# Altium PCB CL-HC-SubV2.0(change).PcbDoc (part 1 of 2)
Units mm, origin at the board's own origin, x right, y up, seen from the top; angles counter-clockwise.
Board outline 326.29 x 232.51 mm, 2 copper layers (TopLayer, BottomLayer); 149 components, 528 nets, 577 pads, 1 vias.
Unrouted connection lines stored in the file: 44.
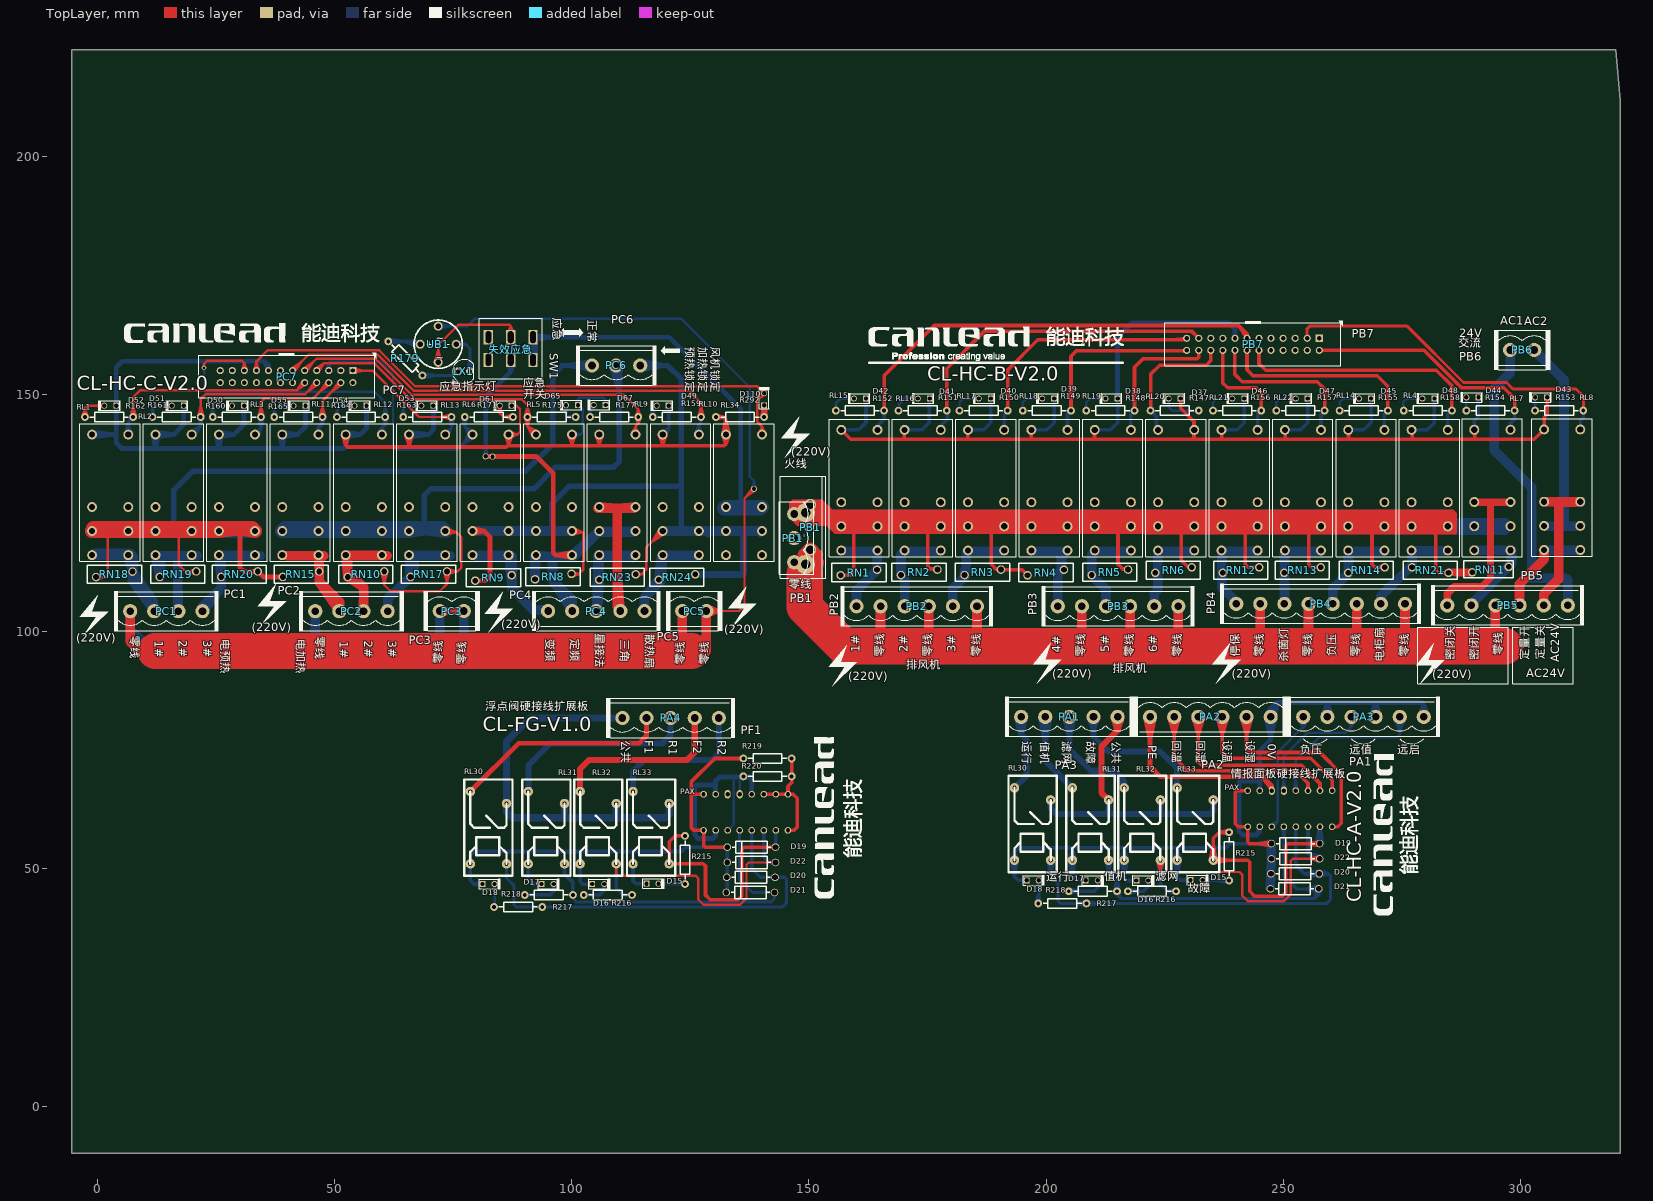
[diagram p0: TopLayer view]
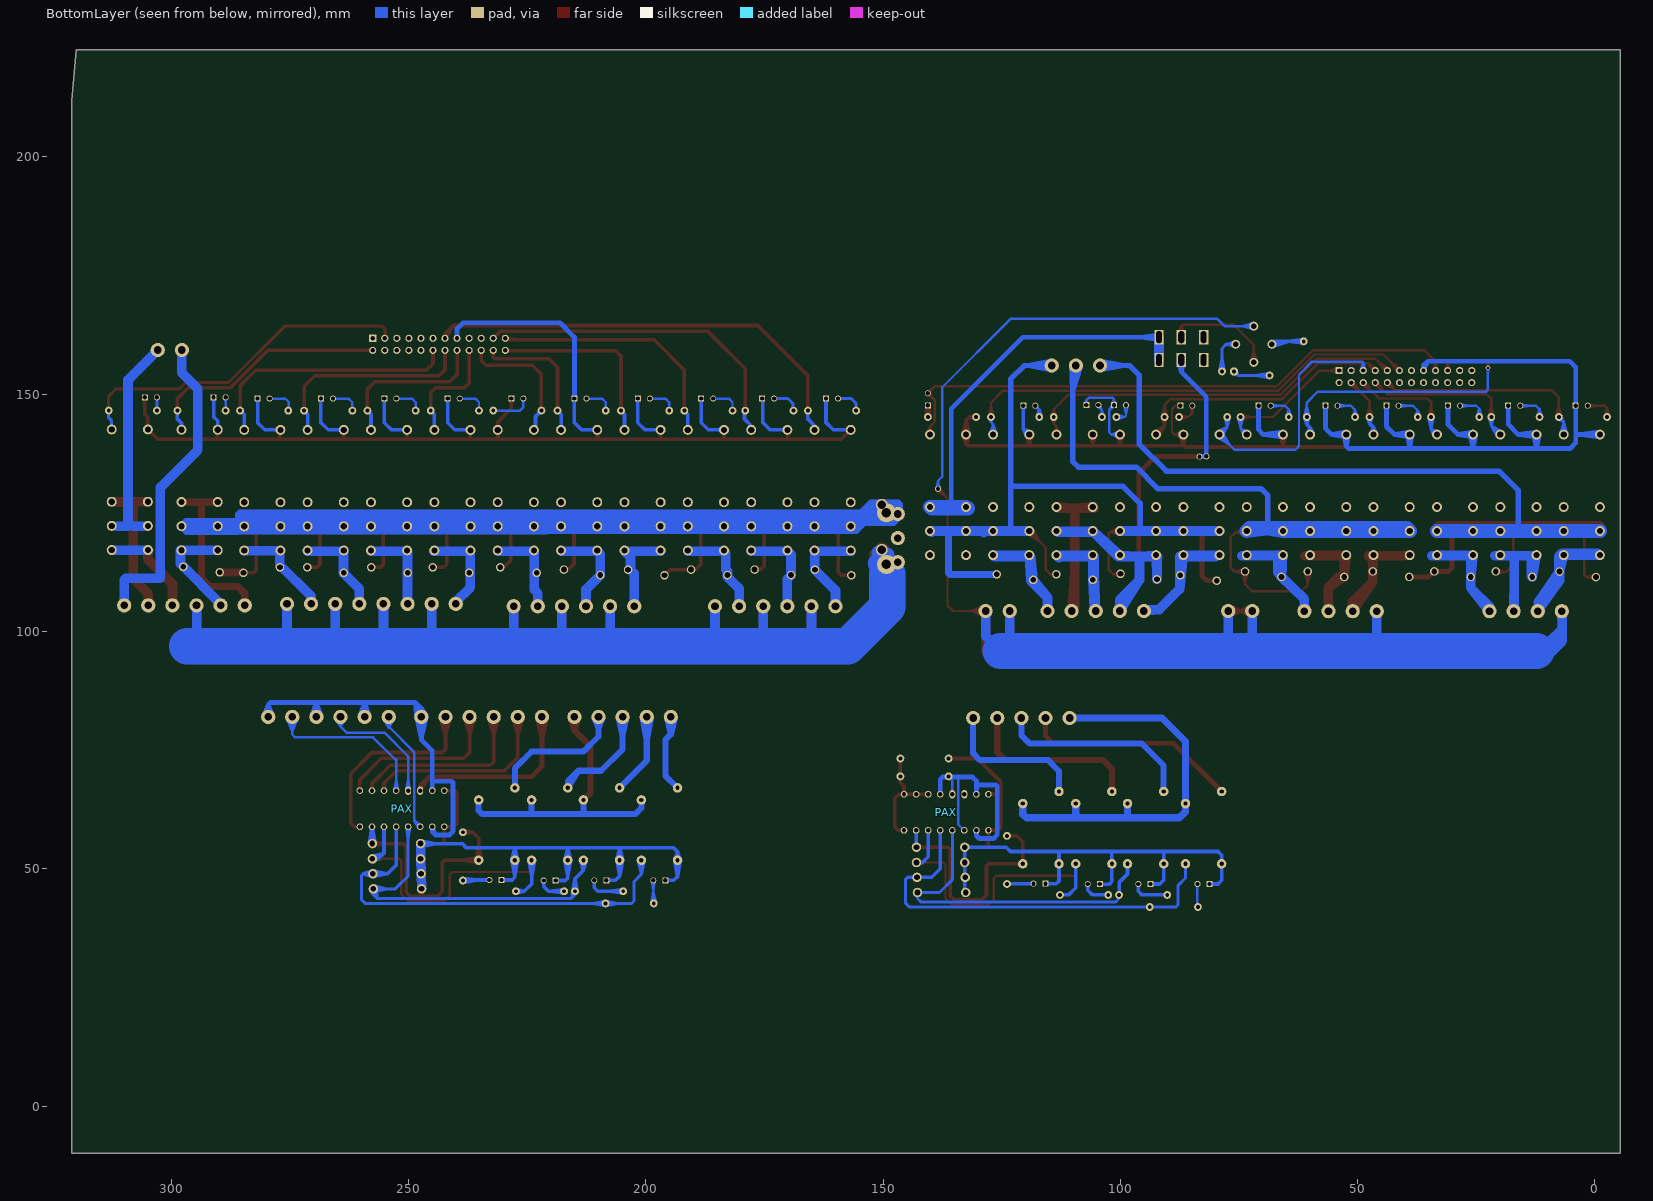
[diagram p1: BottomLayer view, seen from below]

## Layer stack, top to bottom
TopSolder: solder mask 0.0102, Solder Resist, Dk 3.5
TopLayer: signal copper 0.0356
Dielectric1: dielectric 0.32, FR-4, Dk 4.8
BottomLayer: signal copper 0.0356
BottomSolder: solder mask 0.0102, Solder Resist, Dk 3.5

## Board outline
319.972,222.595 -5.344,222.595 -5.344,-9.912 320.949,-9.912 320.949,211.849

## Design rules (kind name [scope] priority, off if disabled: settings)
Clearance Clearance_1 [All] p1 off: gap=0.762
Clearance [All] p2: gap=0.381
ComponentClearance [All] p1 off: gap=0.254 collisioncheckmode=3 verticalgap=0.254 showdistances=FALSE
FabricationTestPointUsage TestPointUsage [All] p1: valid=0 allowmultiple=FALSE
FabricationTestpoint Testpoint [All] p1: side=3 testpointundercomponent=TRUE minsize=1.016 maxsize=2.54 preferedsize=1.524 minholesize=0.508 maxholesize=1.016 preferedholesize=0.813 testpointgrid=0.025 allowsidetop=TRUE allowsidebottom=TRUE usegrid=TRUE gridtolerance=0
PolygonConnect PolygonConnect_1 [All vs (InPadClass('All Pads'))] p1: connectstyle=NoConnect reliefconductorwidth=0.254 reliefentries=4 polygonreliefangle="90 Angle" airgapwidth=0.254
PolygonConnect [All] p2: connectstyle=Direct reliefconductorwidth=0.254 reliefentries=4 polygonreliefangle="90 Angle" airgapwidth=0.254
RoomDefinition patch [InComponentClass('patch')] p1: confinementstyle=ConfineIn formatcopy=TRUE lockcomponents=FALSE outline -54.61,196.096 -24.13,196.096 -24.13,108.694 -54.61,108.694
RoomDefinition Lights [InComponentClass('Lights')] p2: confinementstyle=ConfineIn formatcopy=TRUE lockcomponents=FALSE outline 360.625,80.25 387.15,80.25 387.15,99.575 360.625,99.575
RoomDefinition MCU单片机 [InComponentClass('MCU单片机')] p3: confinementstyle=ConfineIn formatcopy=TRUE lockcomponents=FALSE outline 391.925,252.175 354.3,252.175 354.3,272.05 391.925,272.05
RoutingVias [All] p1: holewidth=0.61 width=1.016 viastyle="Through Hole" minholewidth=0.61 minwidth=1.016 maxholewidth=0.61 maxwidth=1.016
SilkToSolderMaskClearance SilkscreenOverComponentPads [IsPad] p1: minsilkscreentomaskgap=0.254 clearancetoexposedcopper=TRUE
SolderMaskExpansion [All] p1: expansion=0.102
Width [All] p1: maxlimit=7.62 minlimit=0.254 preferedwidth=0.762
25 further rules are at their usual default settings.

## Classes and differential pairs
component class MCU单片机: 1 24V C1 C2 C3 C4 C5 C6 C7 C8 C19 C20 C29 C30 C31 C32 C34 C35 CU1 F F2 P P1 R2 R11 R12 R13 R35 R79 U1 VR1 ѹ? 冷/自/热 定频/变频 客户接线自动门1 情报面 星/三角 电柜内部1 电柜内部2 电柜风扇
component class Lights: D74 Q11 R118 R194 RN22 Y1 Y2

## Components (designator, comment, footprint, x,y, rotation, side; value= is the part's Value field where it differs from the comment)
D15 "" RT_LED1 231.669,47.653 r180 top (schematic designator D64)
D15 "" RT_LED1 117.031,46.891 r180 top (schematic designator D64)
D16 "" RT_LED1 220.239,47.554 r180 top (schematic designator D63)
D16 "" RT_LED1 105.601,46.792 r180 top (schematic designator D63)
D17 "" RT_LED1 209.571,47.568 r180 top (schematic designator D62)
D17 "" RT_LED1 94.933,46.806 r180 top (schematic designator D62)
D18 "" RT_LED1 197.125,47.568 r180 top (schematic designator D59)
D18 "" RT_LED1 82.487,46.806 r180 top (schematic designator D59)
D19 "1n4007" DIODEAK 252.509,55.326 r180 top (schematic designator D70)
D19 "1n4007" DIODEAK 137.87,54.564 r180 top (schematic designator D70)
D20 "1n4007" DIODEAK 252.408,48.965 r180 top (schematic designator D69)
D20 "1n4007" DIODEAK 137.77,48.203 r180 top (schematic designator D69)
D21 "1n4007" DIODEAK 252.3,45.784 r180 top (schematic designator D4)
D21 "1n4007" DIODEAK 137.662,45.022 r180 top (schematic designator D4)
D22 "1n4007" DIODEAK 252.509,52.105 r180 top (schematic designator D68)
D22 "1n4007" DIODEAK 137.87,51.343 r180 top (schematic designator D68)
D37 "GREEN" RT_LED1 227.038,149.081 r0 top
D38 "GREEN" RT_LED1 213.751,149.081 r0 top
D39 "GREEN" RT_LED1 200.4,149.081 r0 top
D40 "GREEN" RT_LED1 187.049,149.081 r0 top
D41 "GREEN" RT_LED1 174.206,149.081 r0 top
D42 "RED" RT_LED1 160.744,149.081 r0 top
D43 "GREEN" RT_LED1 304.254,149.335 r0 top
D44 "GREEN" RT_LED1 289.776,149.335 r0 top
D45 "GREEN" RT_LED1 267.155,149.081 r0 top
D46 "" RT_LED1 240.453,149.081 r0 top
D47 "GREEN" RT_LED1 253.804,149.081 r0 top
D48 "GREEN" RT_LED1 280.507,149.081 r0 top
D49 "GREEN" RT_LED1 119.182,147.574 r0 top locked
D50 "GREEN" RT_LED1 29.718,147.574 r0 top locked
D51 "" RT_LED1 17.018,147.574 r0 top locked
D52 "GREEN" RT_LED1 2.794,147.574 r0 top locked
D53 "GREEN" RT_LED1 69.596,147.574 r0 top locked
D54 "GREEN" RT_LED1 55.515,147.574 r0 top locked
D55 "GREEN" RT_LED1 42.672,147.574 r0 top locked
D61 "GREEN" RT_LED1 86.106,147.574 r0 top locked
D65 "GREEN" RT_LED1 100.076,147.701 r0 top locked
D67 "GREEN" RT_LED1 105.899,147.724 r0 top locked
D110 "GREEN" RT_LED1 140.548,148.932 r270 top
LX1 "" LEDA 76.039,154.81 r180 top locked (schematic designator 红?)
PA1 "情报面板与电柜输入" pl5xQ 204.862,82.014 r0 top (schematic designator 外?)
PA2 "模拟-硬连接" PL6XQ 234.572,82.014 r180 top (schematic designator 外?)
PA3 "外接情报面板接口1" PL6XQ 266.838,82.014 r0 top
PA4 "情报面板与电柜输入" pl5xQ 120.855,81.788 r0 top (schematic designator 外?)
PAX "Header 8X2" centipede-16 251.323,62.669 r90 bottom (schematic designator P19)
PAX "Header 8X2" centipede-16 136.684,61.907 r90 bottom (schematic designator P19)
PB1 "硬接线" 95-2P 150.26,117.221 r90 top (schematic designator AC24Vin2)
PB1' "硬接线" PL3X 146.878,114.607 r90 top (schematic designator 客户接线1)
PB2 "Header 6" PL6XQ 172.706,105.317 r0 top (schematic designator 客户接线2)
PB3 "Header 6" PL6XQ 215.124,105.317 r0 top (schematic designator 客户接线3)
PB4 "Header 8" PL8XQ 257.796,105.825 r0 top (schematic designator 杀菌/停保)
PB5 "硬接线" PL6XQ 297.182,105.511 r0 top (schematic designator 客接新?)
PB6 "硬接线" PL2XQ 300.255,159.316 r180 top (schematic designator AC24Vin2)
PB7 "Con2*12-1mm" FC24LX 243.548,160.511 r180 top (schematic designator P21)
PC1 "Header 4" PL4XQ 14.608,104.291 r0 top locked (schematic designator 再热)
PC2 "Header 4" PL4XQ 53.597,104.291 r0 top locked (schematic designator 预热)
PC3 "硬接线" PL2XQ 74.743,104.318 r180 top locked (schematic designator P24)
PC4 "硬接线" PL5XQ 105.193,104.318 r180 top locked (schematic designator 送风机)
PC5 "硬接线" PL2XQ 125.853,104.318 r180 top locked (schematic designator P24)
PC6 "Header 3" PL3XQ 104.288,156.05 r0 top locked (schematic designator 火线)
PC7 "Con2*12-1mm" FC24LX 39.938,153.71 r180 top (schematic designator P21)
R147 "15K" AXIAL0.4 232.118,146.541 r180 top
R148 "15K" AXIAL0.4 208.431,146.55 r0 top
R149 "15K" AXIAL0.4 195.066,146.541 r0 top
R150 "15K" AXIAL0.4 181.715,146.541 r0 top
R151 "15K" AXIAL0.4 168.885,146.541 r0 top
R152 "15K" AXIAL0.4 155.677,146.55 r0 top
R153 "15K" AXIAL0.4 302.997,146.56 r0 top
R154 "15K" AXIAL0.4 288.519,146.55 r0 top
R155 "15K" AXIAL0.4 261.821,146.541 r0 top
R156 "15K" AXIAL0.4 235.133,146.55 r0 top
R157 "15K" AXIAL0.4 248.484,146.55 r0 top
R158 "15K" AXIAL0.4 275.311,146.55 r0 top
R159 "15K" AXIAL0.4 117.104,145.204 r0 top locked
R160 "15K" AXIAL0.4 24.394,145.204 r0 top locked
R161 "15K" AXIAL0.4 11.694,145.204 r0 top locked
R162 "15K" AXIAL0.4 -2.53,145.204 r0 top locked
R163 "15K" AXIAL0.4 64.526,145.204 r0 top locked
R164 "15K" AXIAL0.4 50.556,145.204 r0 top locked
R165 "15K" AXIAL0.4 37.348,145.204 r0 top locked
R171 "15K" AXIAL0.4 87.617,145.185 r180 top locked
R175 "15K" AXIAL0.4 100.834,145.185 r180 top locked
R177 "15K" AXIAL0.4 103.899,145.204 r0 top locked
R179 "51K 2512 1W" AXIAL0.4 68.538,153.957 r135 top locked
R215 "15K" AXIAL0.4 238.518,47.568 r90 top (schematic designator R174)
R215 "15K" AXIAL0.4 123.88,46.806 r90 top (schematic designator R174)
R216 "15K" AXIAL0.4 217.205,45.278 r0 top (schematic designator R173)
R216 "15K" AXIAL0.4 102.566,44.516 r0 top (schematic designator R173)
R217 "15K" AXIAL0.4 204.759,45.278 r0 top (schematic designator R172)
R217 "15K" AXIAL0.4 90.12,44.516 r0 top (schematic designator R172)
R218 "15K" AXIAL0.4 198.307,42.738 r0 top (schematic designator R169)
R218 "15K" AXIAL0.4 83.668,41.976 r0 top (schematic designator R169)
R219 "100K" AXIAL0.4 146.333,73.248 r180 top (schematic designator R173)
R220 "20K" AXIAL0.4 146.333,69.472 r180 top (schematic designator R173)
R292 "15K" AXIAL0.4 130.401,145.204 r0 top locked
RL1 "三级预热" HF115-5#1 2.777,128.789 r0 top locked
RL2 "二级预热" HF115-5#1 16.134,128.789 r0 top locked
RL3 "一级预热" HF115-5#1 29.491,128.789 r0 top locked
RL4 "送风机散热风扇" HF115-5#1 280.774,129.789 r0 top
RL5 "送风机定频起停" HF115-5#1 96.277,128.789 r0 top locked
RL6 "送风机变频起停" HF115-5#1 82.92,128.789 r0 top locked
RL7 "新风密闭执行" HF115-5#1 293.983,129.817 r0 top
RL8 "新风定量执行" HF115-5#1 308.699,129.884 r0 top
RL9 "星三角切换" HF115-5#1 109.635,128.789 r0 top locked
RL10 "电柜散热风扇" HF115-5#1 122.992,128.789 r0 top locked
RL11 "三级再热" HF115-5#1 42.849,128.789 r0 top locked
RL12 "二级再热" HF115-5#1 56.206,128.789 r0 top locked
RL13 "一级再热" HF115-5#1 69.563,128.789 r0 top locked
RL14 "负压排风" HF115-5#1 267.423,129.789 r0 top
RL15 "6#排风机" HF115-5#1 160.614,129.789 r0 top
RL16 "5#排风机" HF115-5#1 173.965,129.789 r0 top
RL17 "4#排风机" HF115-5#1 187.317,129.789 r0 top
RL18 "3#排风机" HF115-5#1 200.668,129.789 r0 top
RL19 "2#排风机" HF115-5#1 214.019,129.789 r0 top
RL20 "1#排风机" HF115-5#1 227.37,129.789 r0 top
RL21 "停机保护" HF115-5#1 240.721,129.789 r0 top
RL22 "杀菌灯" HF115-5#1 254.072,129.789 r0 top
RL30 "POL->运行监控" RELAY12V 190.757,67.058 r270 top (schematic designator RL33)
RL30 "POL->运行监控" RELAY12V 76.118,66.296 r270 top (schematic designator RL33)
RL31 "POL->值机监控" RELAY12V 202.967,67.058 r270 top (schematic designator RL32)
RL31 "POL->值机监控" RELAY12V 88.329,66.296 r270 top (schematic designator RL32)
RL32 "POL->加湿电磁阀" RELAY12V 213.881,67.058 r270 top (schematic designator RL31)
RL32 "POL->加湿电磁阀" RELAY12V 99.243,66.296 r270 top (schematic designator RL31)
RL33 "POL->加湿电磁阀" RELAY12V 225.024,67.058 r270 top (schematic designator RL30)
RL33 "POL->加湿电磁阀" RELAY12V 110.386,66.296 r270 top (schematic designator RL30)
RL34 "星三角切换" HF115-5#2 136.314,128.789 r180 top locked
RN1 "1D471" RAD0.3#1 160.514,112.429 r180 top
RN2 "1D471" RAD0.3#1 173.226,112.473 r0 top
RN3 "1D471" RAD0.3#1 186.615,112.473 r0 top
RN4 "1D471" RAD0.3#1 199.884,112.429 r180 top
RN5 "1D471" RAD0.3#1 213.393,112.473 r0 top
RN6 "1D471" RAD0.3#1 226.808,112.937 r0 top
RN8 "1D471" RAD0.3#1 96.13,111.584 r0 top locked
RN9 "1D471" RAD0.3#1 83.522,111.292 r180 top locked
RN10 "1D471" RAD0.3#1 56.685,112.075 r0 top locked
RN11 "1D471" RAD0.3#1 293.585,113.053 r180 top
RN12 "1D471" RAD0.3#1 241.032,112.937 r0 top
RN13 "1D471" RAD0.3#1 253.986,112.937 r0 top
RN14 "1D471" RAD0.3#1 267.448,112.937 r0 top
RN15 "1D471" RAD0.3#1 42.969,112.075 r180 top locked
RN17 "1D471" RAD0.3#1 69.893,112.075 r0 top locked
RN18 "1D471" RAD0.3#1 3.636,112.058 r180 top locked
RN19 "1D471" RAD0.3#1 17.061,112.075 r0 top locked
RN20 "1D471" RAD0.3#1 30.015,112.075 r0 top locked
RN21 "1D471" RAD0.3#2 280.91,112.937 r0 top
RN23 "1D471" RAD0.3#1 109.636,111.463 r0 top locked
RN24 "1D471" RAD0.3#1 122.2,111.463 r0 top locked
UB1 "DB107S" BRI-W04 71.882,160.528 r0 top locked (schematic designator U1X)
失效应急 "Header 6" SEL220V 87.158,159.619 r0 top locked

## Footprints (in the part's own frame and the unit in brackets; to place one, negate y for a bottom-side part, rotate by r counter-clockwise, add the part's x,y. Pads: shape width x height; smd on the part's side, far side on the other; paste and mask are expansions set on the pad)
95-2P [mm]
  round 2.5 hole 1.8: 1(0,0) 2(9.5,0)
  silkscreen extent -6,-3.3 15.5,6.28
AXIAL0.4 [mil]
  round 65 hole 32: 1(-0.52,-0.37) 2(399.48,-0.37)
  silkscreen extent 39,-40 359,40, body extent -12,-45 412,46, height 116
BRI-W04 [mil]
  round 75 hole 45: 1(0,150) 2(0,-150) 3(-150,0) 4(150,0)
  silkscreen extent -200,-200 200,200
centipede-16 [mil]
  round 55 hole 36: 1(150,-350) 2(-150,-350) 3(150,-250) 4(-150,-250) 6(-150,-150) 8(-150,-50) 9(150,50) 10(-150,50) 11(150,150) 12(-150,150) 13(150,250) 14(-150,250) 15(150,350) 16(-150,350)
  oval 70x50 hole 36: 5(150,-150) 7(150,-50)
DIODEAK [mm]
  round 1.6 / inner round 1.6 / far side round 2 hole 1.2: A(-5.08,0) K(5.08,0)
  silkscreen extent -4.06,-1.27 4.06,1.27, body extent -5.53,-1.3 5.53,1.3, height 3.3
FC24LX [mm]
  rect 1.5x1.5 hole 0.9: 1(-13.97,-1.27)
  round 1.5 hole 0.9: 2(-13.97,1.27) 3(-11.43,-1.27) 4(-11.43,1.27) 5(-8.89,-1.27) 6(-8.89,1.27) 7(-6.35,-1.27) 8(-6.35,1.27) 9(-3.81,-1.27) 10(-3.81,1.27) 11(-1.27,-1.27) 12(-1.27,1.27) 13(1.27,-1.27) 14(1.27,1.27) 15(3.81,-1.27) 16(3.81,1.27) 17(6.35,-1.27) 18(6.35,1.27) 19(8.89,-1.27) 20(8.89,1.27) 21(11.43,-1.27) 22(11.43,1.27) 23(13.97,-1.27) 24(13.97,1.27)
  silkscreen extent -18.9,-5.01 18.54,4.5
HF115-5#1 [mm]
  round 2.1 hole 1.3: 1(-3.81,12.7) 2(3.81,12.7) 3(-3.81,-12.7) 3(3.81,-12.7) 4(-3.81,-7.62) 4(3.81,-7.62) 5(-3.81,-2.54) 5(3.81,-2.54)
  silkscreen extent -6.37,-14.01 6.33,14.99
HF115-5#2 [mm]
  round 2.1 hole 1.3: 1(-3.81,-12.7) 2(3.81,-12.7) 3(-3.81,12.7) 3(3.81,12.7) 4(-3.81,7.62) 4(3.81,7.62) 5(-3.81,2.54) 5(3.81,2.54)
  silkscreen extent -6.37,-14.99 6.33,14.01
LEDA [mil]
  oct 65x65 hole 32: A(0,0)
  round 65 hole 32: K(-100,0)
  silkscreen extent -131,-98 46,99
PL2XQ [mm]
  round 3 hole 1.6: 1(-2.54,0) 2(2.54,0)
  silkscreen extent -5.95,-4.25 5.95,4.25
PL3X [mm]
  round 3 hole 1.6: 1(0,0) 2(5.08,0) 3(10.16,0)
  silkscreen extent -2.54,-4.13 12.7,3.18
PL3XQ [mm]
  round 3 hole 1.6: 1(0,0) 2(5.08,0) 3(10.16,0)
  silkscreen extent -3.41,-4.25 13.57,4.25
PL4XQ [mm]
  round 3 hole 1.6: 1(-7.62,0) 2(-2.54,0) 3(2.54,0) 4(7.62,0)
  silkscreen extent -11.03,-4.25 11.03,4.25
pl5xQ [mm]
  round 3 hole 1.6: 1(-10.16,0) 2(-5.08,0) 3(0,0) 4(5.08,0) 5(10.16,0)
  silkscreen extent -13.57,-4.25 13.57,4.25
PL5XQ [mm]
  round 3 hole 1.6: 1(-10.16,0) 2(-5.08,0) 3(0,0) 4(5.08,0) 5(10.16,0)
  silkscreen extent -13.57,-4.25 13.57,4.25
PL6XQ [mm]
  round 3 hole 1.6: 1(-12.7,0) 2(-7.62,0) 3(-2.54,0) 4(2.54,0) 5(7.62,0) 6(12.7,0)
  silkscreen extent -16.11,-4.25 16.11,4.25
PL8XQ [mm]
  round 3 hole 1.6: 1(-17.78,0) 2(-12.7,0) 3(-7.62,0) 4(-2.54,0) 5(2.54,0) 6(7.62,0) 7(12.7,0) 8(17.78,0)
  silkscreen extent -21.19,-4.25 21.19,4.25
RAD0.3#1 [mm]
  round 1.8 hole 1.2: 1(3.84,0.58) 2(-3.84,-0.58)
  silkscreen extent -5.76,-1.91 5.67,1.91
RAD0.3#2 [mm]
  round 1.8 hole 1.2: 1(3.84,-0.58) 2(-3.84,0.58)
  silkscreen extent -5.76,-1.91 5.67,1.91
RELAY12V [mm]
  round 2 hole 0.9: 1(15.24,2.54) 2(15.24,10.16) 3(0,2.54) 4(2.54,10.16)
  silkscreen extent -2.54,1.27 17.78,11.43
RT_LED1 [mil]
  rect 50x50 hole 36: A(50,0)
  round 50 hole 36: K(-50,0)
  silkscreen extent -100,-44 84,44, body extent -84,-44 84,44, height 236
SEL220V [mm]
  rect 2x3 hole 1.2 slot 2.5 at 90 deg: 1(-4.7,-2.4) 2(0,-2.4) 3(4.7,-2.4) 4(-4.7,2.4) 5(0,2.4) 6(4.7,2.4)
  silkscreen extent -6.6,-6.4 6.6,6.4

## Part data
D15 D15 D16 D16 D17 D17 D18 D18 D37 D38 D39 D40 D41 D42 D43 D44 D45 D46 D47 D48 D49 D50 D51 D52 D53 D54 D55 D61 D65 D67 D110: library part LED, "Zener Diode"
D19 D19 D20 D20 D21 D21 D22 D22: library part DIODE, "Diode"
PA1 PA4: library part "Header 5", "Header, 5-Pin"
PA2 PA3: library part "Header 6", "Header, 6-Pin"
PAX PAX: "Header, 8-Pin, Dual"
PC3 PC5: library part "Header 2", "Header, 2-Pin"
R147 R148 R149 R150 R151 R152 R153 R154 R155 R156 R157 R158 R159 R160 R161 R162 R163 R164 R165 R171 R175 R177 R179 R215 R215 R216 R216 R217 R217 R218 R218 R219 R220 R292: library part RES2
RL1 RL2 RL3 RL4 RL5 RL6 RL10 RL11 RL12 RL13 RL14 RL15 RL16 RL17 RL18 RL19 RL20 RL21 RL22 RL30 RL30 RL31 RL31 RL32 RL32 RL33 RL33: library part RELAY
RL34: library part HF3FF
RN1 RN2 RN3 RN4 RN5 RN6 RN8 RN9 RN10 RN11 RN12 RN13 RN14 RN15 RN17 RN18 RN19 RN20 RN21 RN23 RN24: library part RN
UB1: library part Bridge
失效应急: "Header, 6-Pin"

## Free pads (board coordinates)
  round 1.27 hole 0.914: 0(81.88,136.901) 1(83.332,136.841) 2(138.41,130.059)
  round 4 hole 2: 0(149.273,114.123) 0(149.273,125.023)
  round 1.651 hole 0.914: 0(290.26,142.304)

## Via types
v1: diameter 1.016, hole 0.61, TopLayer to BottomLayer, tented both sides, 1 vias

## Nets (pads, with @x,y where several pads share a name; then routed paths per layer and width w, separated by ;. In a path a pad name is that pad's centre, name@x,y a point inside that pad or via, vN(x,y) a via of type N, cw(c..) or ccw(c..) an arc to the next point about the centre after c; other vN are vias at no path point)
1C2: PC4.5 RL6.3 RN9.2 | length 66.6
  BottomLayer w2.032: RL6.3@79.11,116.089 RL6.3@86.356,115.803 ; RL6.3@79.531,116.073 RL6.3@86.73,116.089 ; PC4.5@95.022,104.605 91.863,104.605 ; PC4.5@95.033,104.318 91.863,104.605 ; RL6.3@86.73,116.089 RN9.2@87.362,111.872 ; RL6.3@86.73,116.089 87.515,108.953 ; RL6.3@86.73,116.089 79.895,115.803 RL6.3@87.515,115.803 ; RN9.2@87.362,111.872 RL6.3@87.515,115.803 ; RN9.2@87.362,111.872 87.515,108.953 ; 87.515,108.953 RL6.3@87.515,115.803 ; 87.515,108.953 91.863,104.605
1C3: pad.0@81.88,136.901 pad.1 PC4.4 RL5.3 RL9.4 RN8.2 失效应急.2 | length 209.2
  TopLayer w1.016: 85.563,136.901 pad.0@81.88,136.901 pad.1@83.332,136.841 ; 87.017,136.901 pad.1@83.332,136.841 ; RL5.3@100.045,115.549 96.605,116.089 ; RL5.3@100.045,116.63 96.605,116.089 ; RL5.3@100.087,116.089 96.605,116.089 ; pad.1@83.332,136.841 pad.0@81.88,136.901 92.541,136.901 96.122,133.321 96.122,116.573 96.605,116.089
  BottomLayer w1: 81.88,140.536 pad.0@81.88,136.901 ; 失效应急.2@86.662,156.657 87.158,154.71 ; 失效应急.2@87.158,156.719 87.158,154.71 ; 失效应急.2@87.158,157.219 87.158,154.71 ; 失效应急.2@87.654,156.657 87.158,154.71 ; pad.0@81.88,136.901 83.272,136.901 pad.1@83.332,136.841 pad.0@81.88,136.901 ; pad.0@81.88,136.901 81.88,149.432 87.158,154.71
  BottomLayer w2.032: RL5.3@92.181,115.805 RL5.3@92.228,115.758 ; PC4.4@100.102,104.605 100.102,106.719 ; RL5.3@100.211,116.198 RL9.4@105.825,121.169 ; RL5.3@100.461,115.813 RL9.4@105.825,121.169 ; RL9.4@105.807,121.158 RL9.4@105.534,120.885 ; RL9.4@106.26,120.885 RL9.4@113.445,121.169 ; RL9.4@112.993,120.885 RL9.4@105.825,121.169 ; RL9.4@113.028,121.153 RL9.4@105.825,121.169 ; RL9.4@113.154,120.885 RL9.4@105.534,120.885 ; RL5.3@92.228,115.758 92.275,115.805 96.203,115.805 ; RL5.3@92.228,115.758 RL5.3@92.29,115.696 ; RN8.2@92.29,111.004 RL5.3@92.29,115.696 ; RN8.2@92.29,111.004 RL5.3@92.467,116.089 ; RN8.2@92.29,111.004 RL5.3@92.29,115.696 ; RN8.2@92.29,111.004 RL5.3@92.467,116.089 ; RL5.3@92.467,116.089 96.203,115.805 ; 95.959,110.862 95.959,115.561 96.203,115.805 ; 95.959,110.862 100.102,106.719 ; 95.959,110.862 PC4.4@100.113,104.318 ; 96.203,115.805 100.454,115.805 RL9.4@105.534,120.885 ; 96.203,115.805 RL5.3@100.087,116.089 RL9.4@105.534,120.885 ; 100.102,106.719 PC4.4@100.113,104.318 ; 100.102,106.719 PC4.4@100.113,104.318
1C6: PB4.7 RL4.3 RN21.2 | length 21.6
  BottomLayer w2.032: PB4.7@270.496,105.825 270.496,107.449 277.104,114.057 277.104,117.025 RL4.3@284.724,117.025
1C7: PC1.4 RL3.3 RN20.2 | length 55.5
  BottomLayer w2.032: PC1.4@22.111,105.137 26.175,109.201 ; PC1.4@22.228,104.291 26.175,109.201 ; RL3.3@26.149,116.083 RL3.3@33.301,116.089 ; RL3.3@32.83,116.001 RL3.3@25.681,116.089 ; RL3.3@25.681,116.089 26.784,116.001 ; RL3.3@25.681,116.089 RN20.2@26.175,111.495 ; RL3.3@25.681,116.089 26.784,116.001 ; 26.175,109.201 RN20.2@26.175,111.495 ; RN20.2@26.175,111.495 26.175,115.393 26.784,116.001 ; 26.784,116.001 34.404,116.001 RL3.3@33.301,116.089 ; 26.784,116.001 RL3.3@33.301,116.089
1C8: PC1.3 RL2.3 RN19.2 | length 55.1
  BottomLayer w2.032: PC1.3@17.031,105.137 17.031,116.001 ; 17.031,111.895 PC1.3@17.148,104.291 ; RL2.3@12.324,116.089 17.031,116.001 ; RL2.3@12.324,116.089 13.433,116.001 ; RL2.3@12.324,116.089 13.433,116.001 ; RL2.3@12.324,116.089 13.433,111.707 13.433,116.001 ; RL2.3@12.324,116.089 RN19.2@13.221,111.495 13.433,116.001 ; 13.433,116.001 17.031,116.001 ; 17.031,116.001 21.053,116.001 RL2.3@19.944,116.089 17.031,116.001
1C9: PC1.2 RL1.3 RN18.2 | length 86.8
  BottomLayer w2.032: RL1.3@-1.033,116.089 RL1.3@6.179,116.428 ; RL1.3@-0.635,116.108 RL1.3@6.587,116.089 ; RL1.3@-0.604,116.428 7.016,116.428 RL1.3@7.575,115.868 ; RL1.3@-0.587,116.428 RL1.3@6.587,116.089 ; 8.291,111.479 PC1.2@12.068,104.291 ; PC1.2@11.951,105.137 11.951,106.28 ; RL1.3@6.587,116.089 RN18.2@7.575,112.506 ; RL1.3@6.587,116.089 RN18.2@7.476,112.638 ; 7.476,110.755 7.476,111.688 ; 7.476,110.755 11.951,106.28 ; 7.476,110.755 RN18.2@7.476,112.638 ; 7.476,110.755 PC1.2@12.068,104.291 ; 7.476,111.688 RN18.2@7.476,112.638 ; 7.476,111.688 7.575,111.788 RN18.2@7.575,112.506 ; 7.476,111.688 RN18.2@7.476,112.638 ; RN18.2@7.476,112.638 RL1.3@7.575,115.868 ; RN18.2@7.476,112.638 11.951,106.28 ; RN18.2@7.575,112.506 RL1.3@7.575,115.868 ; 11.951,106.28 PC1.2@12.068,104.291 ; 11.951,106.28 PC1.2@12.068,104.291 ; 11.951,106.28 PC1.2@12.068,104.291
1C10: PC2.4 RL13.3 RN17.2 | length 73.1
  BottomLayer w2.032: PC2.4@61.217,104.291 61.257,106.903 ; PC2.4@61.257,104.455 61.257,106.903 ; RL13.3@72.902,116.001 RL13.3@65.753,116.089 ; 61.257,106.903 66.837,112.483 ; 61.257,106.903 RN17.2@66.053,111.495 ; RL13.3@65.753,116.089 66.837,116.001 ; RL13.3@65.753,116.089 66.837,112.483 ; RL13.3@65.753,116.089 66.837,116.001 ; RL13.3@65.753,116.089 RL13.3@73.373,116.089 ; RL13.3@65.753,116.089 66.837,116.001 ; RL13.3@65.753,116.089 RN17.2@66.053,111.495 ; RN17.2@66.053,111.495 66.837,116.001 ; RN17.2@66.053,111.495 66.837,112.483 ; RN17.2@66.053,111.495 66.837,112.483 ; RN17.2@66.053,111.495 66.837,112.483 ; 66.837,112.483 66.837,116.001 ; 66.837,116.001 74.457,116.001 RL13.3@73.373,116.089 ; 66.837,116.001 RL13.3@73.373,116.089
1C11: PC2.3 RL12.3 RN10.2 | length 66.7
  TopLayer w2.032: PC2.3@56.137,104.291 56.177,109.313 ; PC2.3@56.177,104.335 56.177,109.313 ; RL12.3@59.545,116.001 RL12.3@52.396,116.089 ; RL12.3@52.396,116.089 53.486,116.001 ; RL12.3@52.396,116.089 53.486,116.001 ; RL12.3@52.396,116.089 RN10.2@52.845,111.495 ; RL12.3@52.396,116.089 RL12.3@60.016,116.089 ; RL12.3@52.396,116.089 53.486,116.001 ; RL12.3@52.396,116.089 RN10.2@52.845,111.495 ; RN10.2@52.845,111.495 53.996,111.495 ; RN10.2@52.845,111.495 52.845,115.36 53.486,116.001 ; RN10.2@52.845,111.495 56.177,109.313 ; RN10.2@52.845,111.495 53.996,111.495 ; 53.486,116.001 61.106,116.001 RL12.3@60.016,116.089 ; 53.486,116.001 RL12.3@60.016,116.089 ; 53.996,111.495 56.177,109.313
1C12: PC2.2 RL11.3 RN15.2 | length 47.3
  TopLayer w2.032: PC2.2@51.097,104.335 51.097,106.25 ; 44.172,116.001 47.755,116.001 ; 44.172,116.001 40.135,116.001 RL11.3@39.039,116.089 44.172,116.001 ; 44.172,116.001 RL11.3@46.659,116.089 ; RL11.3@46.659,116.089 RN15.2@46.809,112.655 ; RL11.3@46.659,116.089 47.755,116.001 ; RL11.3@46.659,116.089 47.755,116.001 ; 46.809,110.538 RN15.2@46.809,112.655 ; 46.809,110.538 51.097,106.25 ; 46.809,110.538 PC2.2@51.057,104.291 ; RN15.2@46.809,112.655 46.809,115.056 47.755,116.001 ; PC2.2@51.057,104.291 51.097,106.25 ; PC2.2@51.057,104.291 51.097,106.25
1C17: PC4.1 RL10.3 RN24.2 | length 65.1
  BottomLayer w2.032: PC4.1@115.342,104.605 115.342,107.153 ; PC4.1@115.353,104.318 115.342,107.153 ; RL10.3@119.588,116.072 RL10.3@126.802,116.089 RL10.3@119.611,115.781 ; RL10.3@126.354,115.781 RL10.3@119.182,116.089 ; RL10.3@126.518,115.781 RL10.3@118.898,115.781 ; 115.342,107.153 RN24.2@118.898,110.709 ; 115.342,107.153 RN24.2@118.36,110.883 ; RN24.2@118.36,110.883 RL10.3@118.898,115.781 ; RN24.2@118.36,110.883 RL10.3@119.182,116.089 ; RN24.2@118.898,110.709 RL10.3@118.898,115.781 ; RN24.2@118.898,110.709 RL10.3@119.182,116.089
1C22: PB4.3 RL22.3 RN13.2 | length 18.8
  BottomLayer w2.032: PB4.3@250.176,105.825 250.176,116.753 250.327,116.904 RL22.3@257.947,116.904
1C27: PB4.1 RL21.3 RN12.2 | length 19.5
  BottomLayer w2.032: PB4.1@239.935,106.305 236.938,109.303 236.938,116.868 236.974,116.904 RL21.3@244.594,116.904
1C31: PB4.5 RL14.3 RN14.2 | length 20.1
  BottomLayer w2.032: PB4.5@260.336,105.825 260.336,108.951 263.68,112.296 263.68,116.904 RL14.3@271.3,116.904
1C32: PB3.5 RL20.3 RN6.2 | length 19.5
  BottomLayer w2.032: PB3.5@222.744,105.317 222.744,108.091 223.513,108.86 223.513,116.904 RL20.3@231.133,116.904
1C33: PB3.3 RL19.3 RN5.2 | length 23.6
  BottomLayer w2.032: 211.568,109.878 RN5.2@209.553,111.893 ; PB3.3@212.584,105.317 212.584,108.862 RN5.2@209.553,111.893 ; RL19.3@217.78,116.904 210.16,116.904 209.553,116.297 RN5.2@209.553,111.893
1C34: PB3.1 RL18.3 RN4.2 | length 20
  BottomLayer w2.032: RL18.3@196.806,116.904 204.426,116.904 203.196,115.674 203.196,113.009 202.424,112.236 PB3.1@202.424,105.317
1C35: PB2.5 RL17.3 RN3.2 | length 20.5
  BottomLayer w2.032: PB2.5@180.326,105.317 180.326,109.08 182.775,111.529 182.775,112.695 183.139,113.059 183.139,116.589 183.453,116.904 RL17.3@191.073,116.904
1C36: PB2.3 RL16.3 RN2.2 | length 19.8
  BottomLayer w2.032: PB2.3@170.166,105.317 170.166,111.114 RN2.2@169.386,111.893 169.386,116.19 170.1,116.904 RL16.3@177.72,116.904
1C37: PB2.1 RL15.3 RN1.2 | length 21
  BottomLayer w2.032: RL15.3@156.747,116.904 164.367,116.904 164.354,116.891 RN1.2@164.354,113.009 160.006,108.661 PB2.1@160.006,105.317
2-38: 
2-39: 
2-40: 
2-41: 
3-24: 
3-25: 
3-26: 
3-27: 
3-28: 
3-69: PA1.1 PA4.2 RL30.3 | length 69.6
  TopLayer w1.016: RL30.3@78.658,66.296 88.816,76.454 114.218,76.454 115.775,78.011 PA4.2@115.775,81.788
  BottomLayer w1.27: RL30.3@193.297,67.058 195.855,69.617 195.855,77.172 194.702,78.325 ; PA1.1@193.843,81.913 194.702,78.325 ; PA1.1@194.702,82.014 194.702,78.325 ; PA1.1@195.561,81.913 194.702,78.325
3-70: PA1.2 PA4.3 RL31.3 | length 74.9
  BottomLayer w1.27: RL31.3@90.869,66.296 90.869,71.776 95.547,76.454 119.169,76.454 120.855,78.14 PA4.3@120.855,81.788 ; PA1.2@198.92,81.944 199.782,76.704 PA1.2@200.644,81.944 ; PA1.2@199.782,82.014 199.782,72.783 RL31.3@205.507,67.058 201.813,70.752
3-71: PA1.3 PA4.4 RL32.3 | length 73.5
  TopLayer w1.27: RL32.3@101.783,66.296 101.783,71.049 103.631,72.898 124.249,72.898 125.935,74.584 PA4.4@125.935,81.788
  BottomLayer w1.27: PA1.3@204.003,81.917 204.862,78.141 ; PA1.3@204.862,82.014 204.862,78.141 ; PA1.3@205.722,81.917 204.862,78.141 ; 204.862,78.141 204.862,75.229 209.423,70.668 214.198,70.668 ; 214.198,70.668 216.421,68.446 ; 214.198,70.668 RL32.3@216.421,67.058 ; RL32.3@216.421,67.058 216.421,68.446 ; RL32.3@216.421,67.058 216.421,68.446
3-72: PA1.4 PA4.5 RL33.3 | length 64.5
  BottomLayer w1.27: RL33.3@112.926,66.296 112.926,70.59 115.234,72.898 129.583,72.898 131.015,74.33 PA4.5@131.015,81.788 ; PA1.4@209.093,81.848 209.942,79.76 ; PA1.4@209.942,82.014 209.942,79.76 ; PA1.4@210.791,81.848 209.942,79.76 ; RL33.3@227.564,67.058 227.564,71.167 224.056,74.676 213.153,74.676 209.942,77.887 209.942,79.76
10V-面板-温度输入: PA2.2 PAX.16@260.213,58.859 | length 49.2
  TopLayer w0.762: PA2.2@241.085,81.849 242.192,78.228 PA2.2@243.299,81.849 ; PA2.2@242.192,82.014 242.192,75.175 242.845,74.522 257.649,74.522 262.141,70.029 262.141,59.587 261.414,58.859 PAX.16@260.213,58.859
10V-面板-湿度输入: PA2.3 PAX.15@260.213,66.479 | length 42.9
  TopLayer w0.762: PA2.3@236.005,81.849 237.112,78.228 PA2.3@238.219,81.849 ; PA2.3@237.112,82.014 237.112,74.522 238.363,73.271 255.737,73.271 260.213,68.795 PAX.15@260.213,66.479
24V: D15.A D16.A D17.A D18.A D19.K D20.K D21.K D22.K D37.A D38.A D39.A D40.A D41.A D42.A D43.A D44.A D45.A D46.A D47.A D48.A D49.A D50.A D51.A D52.A D53.A D54.A D55.A D61.A D65.A D67.A pad.0@290.26,142.304 PAX.1 PAX.2 PB7.15 PC7.15 R219.2 R292.1 RL1.1 RL2.1 RL3.1 RL4.1 RL5.2 RL6.2 RL7.1 RL8.1 RL9.1 RL10.1 RL11.1 RL12.1 RL13.1 RL14.1 RL15.1 RL16.1 RL17.1 RL18.1 RL19.1 RL20.2 RL21.1 RL22.1 RL30.1 RL31.1 RL32.1 RL33.1 RL34.2 | length 1227.2
  TopLayer w0.508: RL6.2@86.73,141.489 88.557,141.489 ; RL6.2@86.753,141.202 88.557,141.489 ; RL6.2@86.753,141.776 88.557,141.489 ; RL6.2@86.904,140.712 88.557,141.489 ; RL6.2@86.904,142.266 88.557,141.489 ; D61.A@87.376,147.574 88.412,147.574 ; D61.A@87.434,147.233 88.412,147.574 ; D61.A@87.434,147.915 88.412,147.574 ; RL5.2@99.304,141.349 100.087,139.226 ; RL5.2@99.8,141.471 100.087,139.226 ; 100.02,139.158 100.087,139.226 ; RL5.2@100.087,141.489 100.087,139.226 ; RL5.2@100.375,141.471 100.087,139.226 ; RL5.2@100.871,141.349 100.087,139.226 ; RL9.1@105.041,141.351 105.825,139.202 ; RL9.1@105.537,141.471 105.825,139.202 ; RL9.1@105.825,141.489 105.825,139.202 ; 105.868,139.158 105.825,139.202 ; RL9.1@106.112,141.471 105.825,139.202 ; RL9.1@106.608,141.351 105.825,139.202 ; 88.412,147.574 89.12,146.866 89.12,142.053 88.557,141.489
  TopLayer w0.762: RL12.1@51.734,141.389 52.396,139.254 ; RL12.1@52.396,141.489 52.396,139.254 ; RL12.1@53.057,141.389 52.396,139.254 ; RL13.1@65.091,141.392 65.753,139.184 ; RL13.1@65.753,141.489 65.753,139.184 ; RL13.1@66.415,141.392 65.753,139.184 ; RL6.2@86.07,141.381 86.73,139.424 ; RL6.2@86.73,141.489 86.73,139.424 ; RL6.2@87.39,141.381 86.73,139.424 ; RL10.1@118.52,141.391 119.182,139.205 ; RL10.1@119.182,141.489 119.182,139.205 ; RL10.1@119.844,141.391 119.182,139.205 ; PAX.1@127.794,65.717 125.542,65.717 125.159,65.334 ; R292.1@130.457,144.755 131.827,145.194 ; R292.1@130.457,145.633 131.827,145.194 ; RL34.2@131.839,141.563 132.504,144.517 ; RL34.2@131.845,141.376 132.504,139.509 ; D19.K@132.79,54.564 128.15,54.564 127.794,54.92 PAX.2@127.794,58.097 125.792,58.097 125.159,58.73 125.159,65.334 ; RL34.2@133.164,141.376 132.504,139.509 ; RL34.2@133.169,141.563 132.504,144.517 ; R219.2@136.187,73.257 130.132,73.257 125.159,68.284 125.159,65.334 ; RL15.1@156.804,142.489 158.801,140.492 302.797,140.492 RL8.1@304.889,142.584 ; 170.1,140.568 RL16.1@170.1,142.304 ; 183.453,140.568 RL17.1@183.453,142.304 ; 196.806,140.568 RL18.1@196.806,142.304 ; 210.16,140.568 RL19.1@210.16,142.304 ; D37.A@228.308,149.081 228.308,147.049 231.133,144.224 231.133,140.568 ; 236.974,140.568 RL21.1@236.974,142.304 ; PAX.1@242.433,66.479 240.18,66.479 239.797,66.096 239.797,59.492 240.43,58.859 ; D19.K@247.4,54.908 244.343,55.326 D19.K@247.4,55.745 ; D19.K@247.429,55.326 242.788,55.326 242.433,55.682 PAX.2@242.433,58.859 ; 250.327,140.568 RL22.1@250.327,142.304 ; 263.68,140.568 RL14.1@263.68,142.304 ; 277.104,140.689 RL4.1@277.104,142.425 ; 290.26,140.568 pad.0@290.26,142.304 ; RL8.1@304.923,142.55 RL8.1@304.889,142.584 ; D43.A@305.524,149.335 305.524,145.779 304.889,145.144 RL8.1@304.889,142.584 ; 52.396,139.254 52.78,138.87 66.067,138.87 ; 65.753,139.184 66.067,138.87 ; 66.067,138.87 86.176,138.87 86.465,139.158 ; 86.465,139.158 86.73,139.424 ; 86.465,139.158 100.02,139.158 105.868,139.158 119.135,139.158 ; 119.135,139.158 132.154,139.158 132.504,139.509 ; 119.135,139.158 119.182,139.205 ; 131.827,145.194 R292.1@130.388,145.194 131.827,145.194 ; 131.827,145.194 132.504,144.517 ; 132.504,139.509 RL34.2@132.504,141.489 132.504,144.517 ; 240.43,58.859 PAX.2@242.433,58.859 ; 240.43,58.859 PAX.2@242.433,58.859
  BottomLayer w0.508: RL5.2@100.087,141.489 101.844,141.489 ; RL5.2@100.111,141.202 101.844,141.489 ; RL5.2@100.111,141.776 101.844,141.489 ; RL5.2@100.268,140.714 101.844,141.489 ; RL5.2@100.268,142.265 101.844,141.489 ; D65.A@101.003,147.748 101.346,148.971 ; D65.A@101.133,147.428 102.338,146.709 ; D65.A@101.619,147.914 102.338,146.709 ; D65.A@101.689,147.748 101.346,148.971 ; D67.A@106.829,147.784 107.169,148.736 ; D67.A@107.169,147.724 107.169,148.736 ; D67.A@107.51,147.784 107.169,148.736 ; 101.346,148.971 D65.A@101.346,147.701 102.338,146.709 ; 101.346,148.971 101.6,149.225 106.68,149.225 107.169,148.736 ; 101.844,141.489 102.338,141.983 102.338,146.709
  BottomLayer w0.762: D18.A@81.217,46.806 79.426,46.806 78.658,47.573 RL30.1@78.658,51.056 78.658,52.87 79.439,53.65 90.923,53.65 ; D17.A@93.663,46.806 91.717,46.806 90.869,47.653 RL31.1@90.869,51.056 90.869,53.596 90.923,53.65 ; 101.783,53.596 RL32.1@101.783,51.056 101.783,47.309 102.299,46.792 D16.A@104.331,46.792 ; 112.926,53.596 RL33.1@112.926,51.056 112.926,47.44 113.475,46.891 D15.A@115.458,46.891 ; RL10.1@118.805,142.042 120.452,142.759 ; RL10.1@119.182,141.489 120.452,142.759 ; RL10.1@119.735,141.113 120.452,142.759 ; 120.452,144.688 D49.A@120.452,147.574 120.452,142.759 ; D21.K@132.582,45.022 132.79,45.23 D19.K@132.79,54.564 124.041,54.564 123.127,53.65 90.923,53.65 ; RL15.1@156.804,142.489 160.462,142.489 162.014,144.041 D42.A@162.014,149.081 ; RL16.1@170.155,142.489 173.813,142.489 175.365,144.041 D41.A@175.365,149.081 ; RL17.1@183.507,142.489 186.807,142.489 188.319,144.001 D40.A@188.319,149.081 ; RL30.1@192.68,51.76 193.297,48.532 RL30.1@193.913,51.76 ; RL30.1@192.687,51.924 193.297,53.632 ; RL30.1@193.907,51.924 193.297,53.632 ; D18.A@195.855,47.568 194.064,47.568 193.297,48.335 RL30.1@193.297,51.818 193.297,53.632 ; RL18.1@196.858,142.489 200.158,142.489 201.67,144.001 D39.A@201.67,149.081 ; RL31.1@204.891,51.76 205.507,48.532 RL31.1@206.124,51.76 ; RL31.1@204.893,51.894 205.507,54.358 ; RL31.1@206.122,51.894 205.507,54.358 ; D17.A@208.301,47.568 206.355,47.568 205.507,48.415 RL31.1@205.507,51.818 205.507,54.358 ; RL19.1@210.209,142.489 213.509,142.489 215.021,144.001 D38.A@215.021,149.081 ; RL32.1@215.805,51.76 216.421,48.532 ; RL32.1@215.807,51.894 216.421,54.358 ; RL32.1@217.035,51.894 216.421,54.358 ; RL32.1@217.037,51.76 216.421,48.532 ; RL33.1@226.948,51.76 227.564,48.532 RL33.1@228.181,51.76 ; RL33.1@226.95,51.894 227.564,54.358 ; RL33.1@228.179,51.894 227.564,54.358 ; D15.A@230.096,47.653 228.113,47.653 ; D15.A@230.399,47.653 228.113,47.653 ; RL21.1@236.911,142.489 240.211,142.489 241.723,144.001 D46.A@241.723,149.081 ; D21.K@246.603,45.745 D20.K@246.715,48.88 ; D21.K@246.607,45.865 D20.K@247.328,48.965 ; D21.K@246.609,45.881 D20.K@247.429,49.092 ; D21.K@246.634,45.981 D20.K@247.945,48.921 ; D22.K@246.811,52.064 D20.K@247.328,48.965 ; D22.K@246.813,52.165 D19.K@247.429,55.326 ; D22.K@246.815,52.186 D20.K@246.714,49.042 ; D22.K@246.831,51.944 D20.K@247.946,49.004 ; D22.K@246.835,52.282 D19.K@248.045,55.268 ; D19.K@247.37,54.71 244.143,55.326 D19.K@247.37,55.943 ; D21.K@247.818,45.944 D20.K@246.715,48.88 ; D21.K@247.834,45.703 D20.K@247.945,48.921 ; D21.K@247.838,45.824 D20.K@247.328,48.965 ; D21.K@247.839,45.803 D20.K@247.429,49.092 ; D22.K@248.015,51.906 D20.K@246.714,49.042 ; D22.K@248.022,52.282 D19.K@246.812,55.268 ; D22.K@248.042,52.025 D20.K@247.328,48.965 ; D22.K@248.045,52.165 D19.K@247.429,55.326 ; D22.K@248.046,52.147 D20.K@247.946,49.004 ; RL22.1@250.262,142.489 253.562,142.489 255.074,144.001 D47.A@255.074,149.081 ; RL14.1@263.613,142.489 266.913,142.489 268.425,144.001 D45.A@268.425,149.081 ; RL4.1@276.964,142.489 280.264,142.489 281.777,144.001 D48.A@281.777,149.081 ; RL7.1@290.173,142.517 290.173,144.398 291.046,145.271 D44.A@291.046,149.335 ; 193.297,53.632 194.077,54.412 205.561,54.412 ; 205.507,54.358 205.561,54.412 ; 205.561,54.412 237.765,54.412 238.679,55.326 D19.K@247.429,55.326 ; 216.421,48.532 RL32.1@216.421,51.818 ; RL32.1@216.421,51.818 216.421,54.358 ; RL32.1@216.421,51.818 216.421,48.071 216.937,47.554 ; 216.937,47.554 D16.A@218.969,47.554 216.937,47.554 ; 227.564,54.358 RL33.1@227.564,51.818 227.564,48.202 228.113,47.653 ; D20.K@246.714,49.042 D22.K@247.429,52.255 ; D20.K@246.714,49.042 D22.K@247.429,52.105 ; D20.K@246.715,48.88 D21.K@247.429,45.992 ; D20.K@246.715,48.88 D21.K@247.22,45.784 ; D19.K@246.812,55.268 247.429,52.04 D19.K@248.045,55.268 ; D19.K@246.812,55.268 246.813,52.046 247.429,48.819 248.045,52.047 D19.K@248.045,55.268 ; D19.K@246.812,55.268 D22.K@247.429,52.105 ; D21.K@247.22,45.784 D21.K@247.429,45.992 ; D21.K@247.22,45.784 D20.K@247.328,48.965 ; D21.K@247.22,45.784 D20.K@247.429,49.092 ; D21.K@247.22,45.784 D20.K@247.945,48.921 ; D20.K@247.328,48.965 D22.K@247.429,52.255 ; D20.K@247.328,48.965 D21.K@247.429,45.992 ; D20.K@247.328,48.965 D22.K@247.429,52.105 ; D21.K@247.429,45.992 D19.K@247.429,55.326 ; D21.K@247.429,45.992 D20.K@247.945,48.921 ; D22.K@247.429,52.105 D19.K@248.045,55.268 ; D22.K@247.429,52.105 D20.K@247.946,49.004 ; D22.K@247.429,52.255 D20.K@247.946,49.004
  BottomLayer w1.016: RL1.1@-1.033,141.489 4.053,141.489 4.064,141.478 ; RL1.1@-0.997,140.948 3.065,141.489 RL1.1@-0.997,142.03 ; RL2.1@11.785,141.438 12.324,138.646 ; RL2.1@12.363,140.949 16.14,141.489 ; RL2.1@12.363,142.03 16.14,141.489 ; RL2.1@12.864,141.438 12.324,138.646 ; D51.A@18.288,147.574 18.288,143.637 16.14,141.489 ; RL3.1@25.142,141.439 25.681,138.555 ; RL3.1@25.728,140.949 28.84,141.489 ; RL3.1@25.728,142.029 28.84,141.489 ; RL3.1@26.221,141.439 25.681,138.555 ; D50.A@30.988,147.574 30.988,143.637 28.84,141.489 ; RL11.1@38.499,141.437 39.039,138.687 ; RL11.1@39.085,140.949 42.235,141.489 ; RL11.1@39.085,142.029 42.235,141.489 ; RL11.1@39.578,141.437 39.039,138.687 ; D55.A@43.942,147.574 43.942,143.196 42.235,141.489 ; RL12.1@51.857,141.43 52.396,139.026 ; RL12.1@52.444,140.949 55.443,141.489 ; RL12.1@52.444,142.029 55.443,141.489 ; RL12.1@52.935,141.43 52.396,139.026 ; D54.A@56.785,147.574 56.785,142.832 55.443,141.489 ; RL13.1@65.753,141.489 69.861,141.489 70.866,142.494 D53.A@70.866,147.574 ; RL13.1@65.789,140.948 69.851,141.489 RL13.1@65.789,142.03 ; D38.A@215.021,149.081 215.021,162.035 218.059,165.073 238.478,165.073 239.738,163.813 PB7.15@239.738,161.781 ; 4.064,141.478 D52.A@4.064,147.574 4.064,155.702 5.317,156.955 35.252,156.955 ; 4.064,141.478 4.064,139.749 5.272,138.541 12.219,138.541 ; 12.219,138.541 12.324,138.646 ; 12.219,138.541 25.668,138.541 ; 12.324,138.646 RL2.1@12.324,141.489 16.14,141.489 ; 25.668,138.541 25.681,138.555 ; 25.668,138.541 39.185,138.541 ; 25.681,138.555 RL3.1@25.681,141.489 28.84,141.489 ; 35.252,156.955 36.128,156.08 ; 35.252,156.955 PC7.15@36.128,154.98 ; PC7.15@36.128,154.98 36.128,156.08 ; PC7.15@36.128,154.98 36.128,156.08 ; PC7.15@36.128,154.98 36.128,156.08 ; 39.039,138.687 RL11.1@39.039,141.489 42.235,141.489 ; 39.039,138.687 39.185,138.541 ; 39.185,138.541 51.911,138.541 52.396,139.026 ; 52.396,139.026 RL12.1@52.396,141.489 55.443,141.489
24V+: 
24V-情报-负压: PA3.1 PAX.6@247.513,58.859 | length 41.2
  BottomLayer w0.508: PAX.6@247.24,59.21 248.783,60.129 ; PAX.6@247.513,58.859 248.783,60.129 ; PAX.6@247.863,58.586 248.783,60.129 ; PA3.1@252.939,81.674 254.138,79.728 ; PA3.1@253.41,81.895 254.138,79.728 ; PA3.1@254.867,81.895 254.138,79.728 ; PA3.1@255.337,81.674 254.138,79.728 ; 248.783,60.129 248.783,74.626 254.138,79.982 ; 254.138,79.728 254.138,79.982 ; 254.138,79.728 PA3.1@254.138,82.014 254.138,79.982
24V-情报-远值: PA3.3 PAX.7@250.053,66.479 | length 40.5
  BottomLayer w0.508: PAX.7@249.673,66.767 250.053,68.892 ; PAX.7@250.053,66.479 250.053,73.737 255.027,78.712 ; PAX.7@250.053,66.733 250.053,68.892 ; PAX.7@250.432,66.767 250.053,68.892 ; 255.281,78.712 263.028,78.712 264.298,79.982 ; PA3.3@263.112,81.632 264.298,79.982 ; PA3.3@263.572,81.88 264.298,79.982 ; PA3.3@264.298,82.014 264.298,79.982 ; PA3.3@265.024,81.88 264.298,79.982 ; PA3.3@265.484,81.632 264.298,79.982
24V-情报-远启: PA3.5 PAX.9@252.593,66.479 | length 50.6
  BottomLayer w0.508: PAX.9@252.15,66.524 252.593,68.702 PAX.9@253.035,66.524 ; PAX.9@252.593,66.479 252.593,73.102 ; 252.847,73.102 257.44,77.696 273.855,77.696 274.458,78.299 PA3.5@274.458,82.014 ; PA3.5@273.239,81.757 274.458,78.99 ; PA3.5@273.726,81.924 274.458,78.99 ; PA3.5@275.191,81.924 274.458,78.99 ; PA3.5@275.677,81.757 274.458,78.99
24V-面板-值机: D21.A PAX.8 R217.2 RL31.2 | length 183.7
  BottomLayer w0.635: R217.2@100.267,44.506 100.267,43.744 101.029,42.982 141.972,42.982 142.742,43.752 D21.A@142.742,45.022 138.105,45.022 135.414,47.713 PAX.8@135.414,58.097 ; R217.2@214.49,44.976 215.667,43.744 ; R217.2@215.388,45.425 215.667,43.744 ; PAX.8@249.673,58.832 250.053,56.256 ; PAX.8@250.433,58.832 250.053,56.256 ; D21.A@256.712,45.922 256.611,43.744 ; D21.A@257.3,45.106 254.475,45.784 D21.A@257.3,46.462 ; D21.A@257.973,45.446 256.611,43.744 ; 215.667,43.744 214.905,44.506 R217.2@214.905,45.268 215.667,43.744 ; 215.667,43.744 256.611,43.744 ; 250.053,56.256 PAX.8@250.053,58.859 250.053,48.475 252.743,45.784 D21.A@257.38,45.784 ; 256.611,43.744 257.38,44.514 ; 256.611,43.744 D21.A@257.38,45.784 ; 257.38,44.514 D21.A@257.38,45.784 ; 257.38,44.514 258.038,45.601 257.38,44.514 ; 257.38,44.514 256.723,45.601 257.38,44.514 ; 257.38,44.514 D21.A@257.38,45.784
  BottomLayer w0.762: RL31.2@98.489,51.056 98.489,48.923 100.267,47.145 R217.2@100.267,44.506 ; RL31.2@212.515,51.728 213.127,49.685 ; RL31.2@213.127,51.818 213.127,49.685 ; RL31.2@213.74,51.728 213.127,49.685 ; R217.2@214.462,45.306 214.905,47.907 ; R217.2@214.905,45.268 214.905,47.907 ; R217.2@215.348,45.306 214.905,47.907 ; 213.127,49.685 214.905,47.907
24V-面板-故障: D19.A PAX.14 R215.2 RL33.2 | length 147.4
  TopLayer w0.762: R215.2@123.889,56.952 121.816,56.952 120.546,55.682 RL33.2@120.546,51.056 127.753,51.056 128.207,50.602 128.207,44.506 129.223,43.49 131.905,43.49 131.935,43.46 135.027,43.46 135.827,44.26 135.827,54.056 136.335,54.564 D19.A@142.95,54.564 ; RL33.2@234.568,51.877 235.184,55.104 RL33.2@235.801,51.877 ; RL33.2@235.243,51.202 238.47,51.818 RL33.2@235.243,52.435 ; R215.2@238.48,57.272 236.454,57.714 ; R215.2@238.48,58.156 236.454,57.714 ; D19.A@257.56,54.908 254.503,55.326 D19.A@257.56,55.745 ; D19.A@257.589,55.326 250.973,55.326 250.465,54.818 250.465,45.022 249.665,44.222 246.573,44.222 246.543,44.252 243.861,44.252 242.845,45.268 242.845,51.364 242.391,51.818 RL33.2@235.184,51.818 235.184,56.444 236.454,57.714 ; 236.454,57.714 R215.2@238.527,57.714 236.454,57.714
  BottomLayer w0.762: D19.A@142.95,54.564 143.034,54.648 PAX.14@143.034,58.097 ; D19.A@256.974,55.4 PAX.14@257.673,58.614 ; D19.A@257.086,55.916 PAX.14@257.673,58.859 ; D19.A@257.603,55.876 PAX.14@257.673,58.859 ; D19.A@258.119,55.899 PAX.14@257.673,58.859 ; D19.A@258.206,55.369 PAX.14@257.673,58.614 ; PAX.14@257.673,58.614 D19.A@257.589,55.326 257.673,55.41 PAX.14@257.673,58.859
24V-面板-滤网: D22.A PAX.12 R216.2 RL32.2 | length 166.2
  TopLayer w0.508: RL32.2@109.403,51.056 109.403,48.833 109.665,48.57 126.061,48.57 126.683,47.949 126.683,43.578 127.816,42.444 135.448,42.444 136.843,43.839 136.843,50.856 137.33,51.343 D22.A@142.95,51.343 ; RL32.2@223.305,51.693 224.041,49.595 ; RL32.2@224.041,51.818 224.041,49.595 ; RL32.2@224.776,51.693 224.041,49.595 ; D22.A@257.525,51.563 255.265,52.105 D22.A@257.525,52.648 ; D22.A@257.589,52.105 251.968,52.105 251.481,51.618 251.481,44.601 250.086,43.206 242.455,43.206 241.321,44.34 241.321,48.711 240.7,49.332 224.303,49.332 224.041,49.595
  BottomLayer w0.762: RL32.2@109.403,51.056 109.403,46.039 110.935,44.506 R216.2@112.713,44.506 ; PAX.12@140.494,58.097 140.494,52.539 141.69,51.343 D22.A@142.95,51.343 ; RL32.2@223.425,51.76 224.041,48.532 RL32.2@224.657,51.76 ; RL32.2@224.041,51.818 224.041,46.801 225.573,45.268 ; R216.2@227.296,44.827 225.573,45.268 ; R216.2@227.296,45.709 225.573,45.268 ; R216.2@227.351,45.268 225.573,45.268 ; PAX.12@255.133,58.859 255.133,53.301 ; D22.A@257.256,51.583 255.133,53.301 ; D22.A@257.795,52.689 255.133,53.301 ; 255.133,53.301 256.328,52.105 ; 255.133,53.301 D22.A@257.589,52.105 ; 256.328,52.105 D22.A@257.589,52.105 ; 256.328,52.105 257.437,51.505 256.328,52.105 ; 256.328,52.105 257.437,52.706 256.328,52.105 ; 256.328,52.105 D22.A@257.589,52.105
24V-面板-运行: D20.A PAX.10 R218.2 RL30.2 | length 203.9
  BottomLayer w0.635: RL30.2@86.278,51.056 86.278,48.081 87.821,46.538 87.821,44.506 87.821,42.474 88.329,41.966 144.463,41.966 145.225,42.728 145.225,47.808 144.83,48.203 ; RL30.2@200.239,51.738 200.917,48.913 RL30.2@201.595,51.738 ; RL30.2@200.917,51.818 200.917,48.843 202.459,47.3 202.459,45.268 202.459,43.236 202.967,42.728 259.101,42.728 259.863,43.49 259.863,48.57 259.469,48.965 ; R218.2@208.406,42.223 205.723,42.728 R218.2@208.406,43.234 ; R218.2@208.501,42.223 211.184,42.728 R218.2@208.501,43.234
  BottomLayer w0.762: PAX.10@137.954,58.097 137.954,49.999 139.75,48.203 D20.A@142.85,48.203 144.83,48.203 ; PAX.10@252.593,58.859 252.593,50.761 254.389,48.965 ; D20.A@257.426,48.349 254.389,48.965 ; D20.A@257.426,49.581 254.389,48.965 ; D20.A@257.585,48.354 259.469,48.965 ; D20.A@257.585,49.576 259.469,48.965 ; 254.389,48.965 D20.A@257.488,48.965 259.469,48.965
24VIN: 
24VIN2: 
164CLK: 
164SDA: 
165S_DO1: 
165S_DO2: 
165S_DO3: 
165S_DO4: 
220V_N: pad.0@149.273,114.123 pad.2 PB1'.1 PB1.1 PB2.2 PB2.4 PB2.6 PB3.2 PB3.4 PB3.6 PB4.2 PB4.4 PB4.6 PB4.8 PB5.3 PC1.1 PC2.1 PC3.1 PC3.2 PC5.1 PC5.2 UB1.1 | length 958.2
  TopLayer w0.508: PC3.2@72.203,104.318 PC3.1@77.283,104.318 ; PC3.2@72.293,103.585 75.227,104.318 ; PC3.2@72.293,105.05 75.227,104.318 ; PC3.2@72.46,103.098 75.227,104.318 ; PC3.2@72.46,105.537 75.227,104.318 ; PC3.1@77.026,103.098 74.259,104.318 ; PC3.1@77.026,105.537 74.259,104.318 ; PC3.1@77.193,103.585 74.259,104.318 ; PC3.1@77.193,105.05 74.259,104.318 ; PC5.1@128.393,104.318 135.265,104.318 136.42,105.473 136.42,128.069 pad.2@138.41,130.059 136.697,128.346 ; PC5.1@128.483,103.585 131.417,104.318 ; PC5.1@128.483,105.05 131.417,104.318 ; PC5.1@128.65,103.098 131.417,104.318 ; PC5.1@128.65,105.537 131.417,104.318 ; pad.2@138.12,130.306 136.697,128.346 ; pad.2@138.657,129.769 136.697,128.346 ; PB1'.1@146.48,114.612 146.566,114.612 149.106,112.072
  TopLayer w2.032: PC1.1@6.988,104.291 6.988,97.908 9.021,95.875 12.306,95.875 ; 123.313,96.151 PC5.2@123.313,104.318 ; 128.393,95.866 PC5.1@128.393,104.318 ; 165.086,99.585 PB2.2@165.086,105.317 ; 175.246,100.772 PB2.4@175.246,105.317 ; 185.406,99.267 PB2.6@185.406,105.317 ; 207.504,99.585 PB3.2@207.504,105.317 ; 217.664,100.772 PB3.4@217.664,105.317 ; 227.824,99.267 PB3.6@227.824,105.317 ; 245.096,100.093 PB4.2@245.096,105.825 ; 255.256,100.093 PB4.4@255.256,105.825 ; 265.416,99.775 PB4.6@265.416,105.825 ; 275.576,99.775 PB4.8@275.576,105.825 ; 294.624,99.506 PB5.3@294.624,105.555
  TopLayer w3.048: 149.106,112.072 149.106,116.028 150.28,117.202 151.455,116.028 ; pad.0@149.433,114.454 150.608,115.628 ; pad.0@150.502,113.279 151.677,114.454
  TopLayer w7.62: 12.306,95.875 12.314,95.866 125.206,95.866 ; 149.106,112.072 149.106,105.178 157.388,96.896 296.575,96.896
  BottomLayer w0.508: UB1.1@71.882,164.338 78.033,164.338 79.557,165.862 123.133,165.862 137.534,151.461 137.534,132.644 138.409,131.769 ; UB1.1@71.981,163.646 74.359,164.338 UB1.1@71.981,165.03 ; pad.2@138.031,130.101 138.409,131.769 ; pad.2@138.788,130.101 138.409,131.769 ; 138.409,131.769 pad.2@138.41,130.059 138.409,131.769
  BottomLayer w2.032: PC1.1@6.871,104.121 6.871,100.565 ; PC1.1@6.988,104.291 6.871,100.565 ; 10.044,94.852 6.871,98.025 6.871,100.565 ; 11.316,97.644 9.792,97.644 6.871,100.565 ; PC2.1@45.977,104.291 46.017,98.452 PC2.1@46.017,104.097 ; 72.203,98.659 PC3.2@72.203,104.318 ; 77.283,98.979 PC3.1@77.283,104.318 ; 123.313,96.026 PC5.2@123.313,104.318 ; 125.206,95.866 128.393,99.053 PC5.1@128.393,104.318 ; 165.086,99.585 PB2.2@165.086,105.317 ; 175.246,100.772 PB2.4@175.246,105.317 ; 185.406,99.267 PB2.6@185.406,105.317 ; 207.504,99.585 PB3.2@207.504,105.317 ; 217.664,100.772 PB3.4@217.664,105.317 ; 227.824,99.267 PB3.6@227.824,105.317 ; 245.096,100.093 PB4.2@245.096,105.825 ; 255.256,100.093 PB4.4@255.256,105.825 ; 265.416,99.775 PB4.6@265.416,105.825 ; 275.576,99.775 PB4.8@275.576,105.825 ; 294.624,99.506 PB5.3@294.624,105.555
  BottomLayer w3.048: pad.0@149.106,115.638 149.106,116.19 ; 150.867,116.063 PB1.1@150.867,116.615 ; 151.677,114.06 151.677,114.612
  BottomLayer w7.62: 12.314,95.866 125.206,95.866 ; 149.106,112.072 149.106,105.178 157.388,96.896 296.575,96.896
485-A: 
485-B: 
485_GND_1: 
485_GND_2: 
485_GND_3: 
485_VCC_1: 
485_VCC_2: 
485_VCC_3: 
+10V: 
+15V: 
<-变频故障: 
<-变频运行: 
<-工频故障: 
<-工频运行: 
<-急停按钮: 
<-本地值机: 
<-本地运行: 
<-远值使能: 
<-远起使能: 
AC24GATE1: 
AC24GATE2: 
AC24V1: PB6.1 RL8.4 | length 45.1
  BottomLayer w2.032: PB6.1@302.795,159.316 309.08,153.031 309.08,122.169 311.379,122.169 ; RL8.4@304.889,122.264 304.984,122.169 307.936,122.169
AC24V2: PB5.6 PB6.2 | length 65.8
  BottomLayer w2.032: PB6.2@297.715,159.316 297.715,154.49 294.348,151.123 294.348,138.268 302.269,130.348 302.269,111.256 309.495,111.256 309.864,110.887 PB5.6@309.864,105.555
AD1: 
AD2: 
AD3: 
AD4: 
AD5: 
AD6: 
CLK_165: 
C变频: 
C情报输出: PA1.5 PA4.1 RL30.4 RL31.4 RL32.4 RL33.4 | length 154.9
  TopLayer w1.27: RL31.4@213.127,64.518 211.603,66.042 211.603,75.748 215.022,79.167 ; PA1.5@214.167,81.883 215.022,79.167 ; PA1.5@215.022,82.014 215.022,79.167 ; PA1.5@215.877,81.883 215.022,79.167
  BottomLayer w1.27: RL30.4@200.917,64.518 200.917,62.813 202.205,61.524 213.123,61.524 ; RL31.4@213.127,64.518 213.127,61.529 213.123,61.524 ; RL32.4@224.041,64.518 224.041,61.524 ; RL33.4@235.184,64.518 235.184,62.286 234.422,61.524 224.041,61.524 ; 213.123,61.524 224.041,61.524
  BottomLayer w1.524: RL31.4@98.489,63.756 98.489,60.767 98.485,60.762 ; RL32.4@109.403,63.756 109.403,60.762 ; PA4.1@110.695,81.788 91.229,81.788 86.278,76.838 RL30.4@86.278,63.756 86.278,62.051 87.567,60.762 98.485,60.762 ; RL33.4@120.546,63.756 120.546,61.524 119.784,60.762 109.403,60.762 ; 98.485,60.762 109.403,60.762
DA_ADD1: 
DA_ADD2: 
DA_WR1: 
DA_WR2: 
DB0: 
DB1: 
DB2: 
DB3: 
DB4: 
DB5: 
DB6: 
DB7: 
DE/RE: 
DE/RE2: 
DI1: 
DI2: 
DI3: 
DI4: 
DI5: 
DI6: 
DI7: 
DI8: 
DI9: 
DI10: 
DI11: 
DI12: 
DI13: 
DI14: 
DI15: 
DI15A: 
DI16: 
DI17: 
DI18: 
DI19: 
DI20: 
DI21: 
DI22: 
DI23: 
DI24: 
DI25: 
DI26: 
DI27: 
DI28: 
DI29: 
DI30: 
DI31: 
DI32: 
DI33: 
DI34: 
DI35: 
DI36: 
DI37: 
DI38: 
DI39: 
DI40: 
EX_A1: 
EX_B1: 